# Allegro board CP2105_TEST_V10A.brd
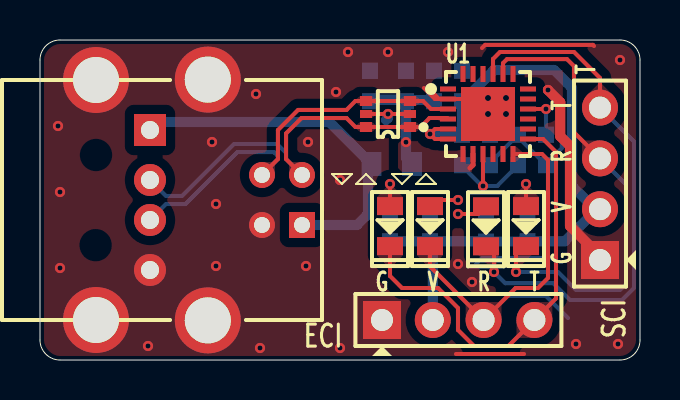
[diagram p0: board, top side]
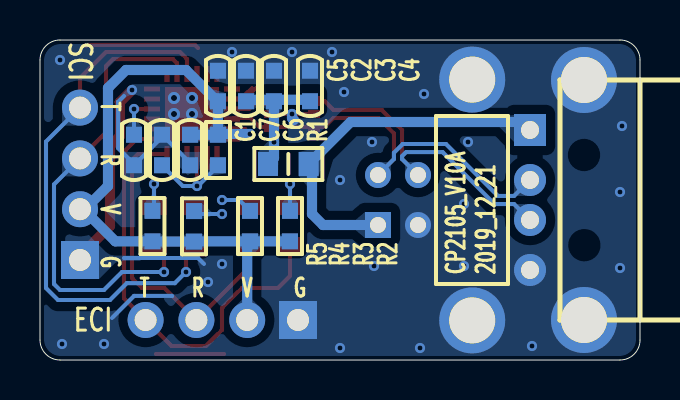
[diagram p1: board, bottom side, seen from below]

Outline 30 x 16 mm; copper layers: TOP, BOTTOM. Coordinates in mm from the lower left corner of the outline.
Outline path: 0,15 arc(0.29,15.71) 1,16 29,16 arc(29.71,15.71) 30,15 30,1 arc(29.71,0.29) 29,0 1,0 arc(0.29,0.29) 0,1 0,15

## Design rules (mm)
constraint set DEFAULT: min track width 0.203, pair gap 0.203
net group USB_D: nets USB_DM USB_DP

## Placement (name value [footprint] x y rotation side)
C1  4.7uF_25V  [C0603]  25.3 10.5 270 bottom
C2  10uF_10V  [C0603]  19.7 13.7 270 bottom
C3  10uF_10V  [C0603]  18.3 13.7 270 bottom
C4  0.1uF_25V  [C0603]  16.5 13.7 270 bottom
C5  10uF_10V  [C0603]  21.1 13.7 270 bottom
C6  0.1uF_25V  [C0603]  22.5 10.5 90 bottom
C7  0.1uF_25V  [C0603]  23.9 10.5 270 bottom
D1  LED_RED  [LED0805]  17.5 6.7 270 top
D2  LED_GREEN  [LED0805]  19.5 6.7 270 top
D3  LED_RED  [LED0805]  22.3 6.69 270 top
D4  LED_GREEN  [LED0805]  24.3 6.7 270 top
J1  -  [CN1X4-2P54-Z]  17.1 2 0 top
J2  -  [CN1X4-2P54-Z]  28 5 90 top
L1  BLM21PG600  [L0805]  17.58 9.8 180 bottom
NOREF  -  []  0 0 0 top
NOREF#2  -  []  0 0 90 top
R1  10K  [R0603]  21.1 10.5 270 bottom
R2  10K  [R0603]  17.5 6.7 270 bottom
R3  10K  [R0603]  19.5 6.7 270 bottom
R4  10K  [R0603]  22.3 6.69 270 bottom
R5  10K  [R0603]  24.38 6.7 270 bottom
U1  CP2105  [QFN24-4X4X0R5-2R7X2R7]  22.4 12.3 270 top
U2  TPD4E1U06DCKR  [SOT363]  17.4 12.3 90 top
USB1  -  [USB-A-MALE]  5.5 11.5 180 bottom
USB2  -  [USB-B]  13.1 8 180 top

## Library data of the parts
C1 = CAP NP
C2-C7 = CAP NP_2
D1-D4 = LED_4
J1 J2 = CONN RCPT 4
L1 = IND_BEAD_0805_600OHM_1
R1-R5 = R_Generic
U1 = CP2105_9
U2 = TPD4E1U06DBVR
USB1 = USB-A-MALE
USB2 = USB-B

## Footprints (pads in the part's own frame, mm; a bottom-side part is the same pattern mirrored in y, then rotated)
C0603
  rect 0.8x0.8 smd: 1(-0.762,0) 2(0.762,0)
CN1X4-2P54-Z
  rect 1.9x1.9 hole 1.1: 1(0,0)
  round 1.8 hole 1.1: 2(2.54,0) 3(5.08,0) 4(7.62,0)
L0805
  rect 1x1.2 smd: 1(-1.016,0) 2(1.016,0)
LED0805
  rect 0.9x1.3 smd: 1(-1,0) 2(1,0)
QFN24-4X4X0R5-2R7X2R7
  rect 0.25x0.8 smd: 1(-1.25,-2) 2(-0.75,-2) 3(-0.25,-2) 4(0.25,-2) 5(0.75,-2) 6(1.25,-2) 13(1.25,2) 14(0.75,2) 15(0.25,2) 16(-0.25,2) 17(-0.75,2) 18(-1.25,2)
  rect 0.8x0.25 smd: 7(2,-1.25) 8(2,-0.75) 9(2,-0.25) 10(2,0.25) 11(2,0.75) 12(2,1.25) 19(-2,1.25) 20(-2,0.75) 21(-2,0.25) 22(-2,-0.25) 23(-2,-0.75) 24(-2,-1.25)
  rect 2.7x2.7 smd: 25(0,0)
R0603
  rect 0.8x0.8 smd: 1(-0.762,0) 2(0.762,0)
SOT363
  rect 0.5x0.6 smd: 1(-0.65,-1.1) 3(0.65,-1.1) 4(0.65,1.1) 6(-0.65,1.1)
  rect 0.4x0.6 smd: 2(0,-1.1) 5(0,1.1)
USB-A-MALE
  rect 1.6x1.6 hole 0.9: 1(0,0)
  round 1.6 hole 0.9: 2(0,-2.5) 3(0,-4.5) 4(0,-7)
  round 3.3 hole 2.3: 5(2.7,2.5) 6(2.7,-9.5)
USB-B
  rect 1.3x1.3 hole 0.8: 1(0,1.25)
  round 1.3 hole 0.8: 2(0,-1.25) 3(2,-1.25) 4(2,1.25)
  round 3.3 hole 2.3: 5(4.71,6.02) 6(4.71,-6.02)

## Nets
GND: C1.2 C2.1 C3.1 C4.1 C5.1 C6.1 C7.1 J1.1 J2.1 U1.2 U1.25 U2.2 U2.5(NC) USB1.4 USB1.5 USB1.6 USB2.4 USB2.5 USB2.6
VCC_3.3V: C5.2 C6.2 J1.2 J2.2 R1.1 R2.2 R3.2 R4.2 R5.2 U1.5(VIO) U1.6
VCC_USB: C2.2 C3.2 C4.2 L1.1 U1.7 U1.8
RXD_ECI: D2.2(CATHODE) J1.3 U1.12
RXD_SCI: D4.2(CATHODE) J2.3 U1.20
TXD_ECI: D1.2(CATHODE) J1.4 U1.13
TXD_SCI: D3.2(CATHODE) J2.4 U1.21
USB_DM: U1.4 U2.1 U2.6 USB1.2 USB2.2
USB_DP: U1.3 U2.3 U2.4 USB1.3 USB2.3
N17444119: D1.1 R2.1
N17444150: C1.1 U1.16
N17444179: D2.1 R3.1
N17444185: D3.1 R4.1
N17444187: D4.1 R5.1
N17461894: C7.2 R1.2 U1.9
N17494883: L1.2(B) USB1.1(VBUS) USB2.1(VBUS)

Pads without a net: U1 1 10 11 14 15 17 18 19 22 23 24

## Via types
v1: diameter 0.508, hole 0.254, TOP to BOTTOM, 34 vias
v2: diameter 0.61, hole 0.305, TOP to BOTTOM, 4 vias

## Routing (per net, layer and track width the routed paths; a pad name or vN(x,y) marks a point on that pad's centre or on a via; arc(x,y) is an arc through that point)
GND: length 41.4
  TOP w0.203: 22.1,15.6 22.26,15.76 27.64,15.76 27.7,15.7 ; 20.8,0.3 24.2,0.3 ; 19.2,13.6 19.75,13.05 19.95,13.05 ; 19.95,13.05 19.4,13.6 ; 19.95,13.05 U1.2 21.65,13.05 v2(22.4,12.3) ; U2.2 v1(17.4,12.3) U2.5
  TOP w0.508: v1(25.4,13.5) 26.01,12.89 26.01,11.19 26.5,10.7 26.5,6.7 28,5.2 J2.1
  BOTTOM w0.203: 26.4,2.1 25.3,3.2 23.4,3.2 23.4,3.2 ; C6.1 22.5,9.86 C7.1 23.9,11.14 C1.2 25.3,9.8 26.09,10.59 26.09,12.91 25.8,13.2 ; 21.8,4.8 22.1,5.1 25.8,5.1
  BOTTOM w0.508: 17.3,12 17.4,12.1 v1(17.4,12.3)
  vias: v1(0.9,11.7) v1(1,8.4) v1(1,4.6) v1(5.4,0.7) v1(8.6,10.9) v1(8.8,7.8) v1(8.8,4.7) v1(10.8,13.3) v1(11,0.6) v1(13.3,4.7) v1(13.4,10.9) v1(14.8,13.4) v1(15,9) v1(15,0.6) v1(15.4,15.4) v1(17.4,15.4) v1(20.4,15.4) v1(20.9,4.8) v1(21.6,3.9) v1(26.8,0.8) v1(28.9,0.8) v1(29,15) v2(22.4,13.1) v2(23.3,13.1) v2(23.3,12.3)
VCC_3.3V: length 35
  TOP w0.203: U1.6 19.75,11.05 v1(19.5,11.3) 19.75,11.55 U1.5
  BOTTOM w0.508: C6.2 R1.1 ; R1.1 C5.2 21.14,12.94 22.7,14.5 25.7,14.5 26.6,13.6 26.6,8.7 27.76,7.54 27.84,7.54 ; R1.1 21.06,11.3 v1(19.5,11.3) ; R2.2 R3.2 ; R3.2 19.64,5.79 J1.2 ; R3.2 22.29,5.93 R4.2 24.37,5.92 R5.2 26.23,5.93 27.84,7.54 ; 27.84,7.54 J2.2
VCC_USB: length 7.3
  TOP w0.254: 21.5,9.6 21.65,9.75 U1.8
  BOTTOM w0.508: C2.2 19.64,13 18.36,13 C3.2 ; L1.1 18.3,10.1 v1(18.3,10.89) C3.2 ; C3.2 18.23,13.01 16.57,13.01 C4.2
RXD_ECI: length 16.7
  TOP w0.203: D2.2 19.5,4.68 J1.3 23.78,3.6 24.9,3.6 25.4,4.1 25.4,10 25.1,10.3 U1.12
RXD_SCI: length 23.9
  TOP w0.203: D4.2 24.1,5.7 23.8,5.4 v1(23.8,4.4) ; J2.3 26.7,11.38 26.7,14.69 26.35,15.04 23.35,15.04 23.15,14.84 U1.20
  BOTTOM w0.203: J2.3 29.3,8.78 29.3,3.8 29,3.5 26.8,3.5 25.9,4.4 v1(23.8,4.4)
TXD_ECI: length 21.9
  TOP w0.203: D1.2 17.5,4.2 18.1,3.6 19.9,3.6 20.9,2.6 20.9,1.5 21.7,0.7 23.42,0.7 J1.4 25.8,3.08 25.8,10.4 25.15,11.05 U1.13
TXD_SCI: length 27.4
  TOP w0.203: U1.21 22.65,15.05 23,15.4 26.7,15.4 28,14.1 J2.4 ; v1(22.7,4.4) 22.7,5.5 22.51,5.69 D3.2
  BOTTOM w0.203: J2.4 29.7,10.92 29.7,3.6 29.1,3 26.5,3 25.66,3.84 23.26,3.84 v1(22.7,4.4)
USB_DM: length 21
  TOP w0.203: U1.4 20.35,12.1 19.48,12.1 19.03,11.65 U2.1 U2.6 15.77,11.65 15.32,12.1 13.07,12.1 12.3,11.33 12.3,10.05 USB2.2
  BOTTOM w0.203: USB2.2 12.3,10.05 12.3,10.36 11.86,10.8 9.7,10.8 7.1,8.2 6.3,8.2 USB1.2
USB_DP: length 21
  TOP w0.203: U1.3 19.55,12.55 19.15,12.95 U2.3 U2.4 15.77,12.95 15.32,12.5 12.9,12.5 11.9,11.5 11.9,10.05 USB2.3
  BOTTOM w0.203: USB1.3 6.3,7.8 7.27,7.8 9.87,10.39 11.69,10.39 11.9,10.19 11.9,10.05 USB2.3
N17444119: length 2.4
  TOP w0.203: D1.1 v1(17.5,8.8)
  BOTTOM w0.203: v1(17.5,8.8) R2.1
N17444150: length 2.2
  TOP w0.203: U1.16 v1(25.3,12.55)
  BOTTOM w0.203: v1(25.3,12.55) C1.1
N17444179: length 3.2
  TOP w0.203: D2.1 19.6,7.7 19.9,8 v1(20.9,8)
  BOTTOM w0.203: R3.1 20.04,8 v1(20.9,8)
N17444185: length 3
  TOP w0.203: v1(20.9,7.3) 21.9,7.3 22.29,7.69 D3.1
  BOTTOM w0.203: R4.1 22.15,7.3 v1(20.9,7.3)
N17444187: length 2.5
  TOP w0.203: D4.1 v1(24.3,8.8)
  BOTTOM w0.203: R5.1 24.3,7.54 v1(24.3,8.8)
N17461894: length 5.3
  TOP w0.203: v1(22.15,8.7) U1.9
  BOTTOM w0.203: C7.2 22.86,8.7 v1(22.15,8.7) 22.1,8.7 21.1,9.7 R1.2
N17494883: length 18.2
  BOTTOM w0.508: USB1.1 5.9,11.9 14.47,11.9 L1.2 16.4,9.63 16.4,7.3 15.85,6.75 USB2.1

## Copper pours and planes (outline as drawn; the poured copper is in the pictures)
GND on TOP: 1,15.8 0.45,15.55 0.2,15 0.2,1 0.45,0.45 1,0.2 29,0.2 29.55,0.45 29.8,1 29.8,15 29.55,15.55 29,15.8 ; 3 cut-outs
GND on BOTTOM: 1,15.8 0.45,15.55 0.2,15 0.2,1 0.45,0.45 1,0.2 29,0.2 29.55,0.45 29.8,1 29.8,15 29.55,15.55 29,15.8 ; 2 cut-outs
VCC_USB on TOP: 21.8,10.7 19.5,10.7 19,11.2 18.1,11.2 17.9,11 17.9,9.6 18.1,9.4 21.6,9.4 21.8,9.6 ; 1 cut-out

Small or netless copper shapes (teardrops, artwork), in the pictures only: 48 on TOP, 43 on BOTTOM

## Text on the board
Ref Des/Silkscreen Bottom: G | V | R | T | 2019_12_21 | CP2105_V10A | ECI | SCI
Ref Des/Silkscreen Top: G | V | R | T | ECI | SCI
BODY_CENTER: FIGURE | FINISHED_SIZE | 0.254 | 0.3048 | 0.8 | 0.9 | 1.1 | 2.3 | DRILL CHART: TOP to BOTTOM | ALL UNITS ARE IN MILLIMETERS | PLATED | QTY | 34 | 4 | 8 | 58 | TOTAL HOLES:
